# Altium PCB otis_v2.PcbDoc
Units mil, origin at the board's own origin, x right, y up, seen from the top; angles counter-clockwise.
Board outline 1718 x 899 mil, 2 copper layers (Top Layer, Bottom Layer); 13 components, 21 nets, 88 pads, 10 vias.
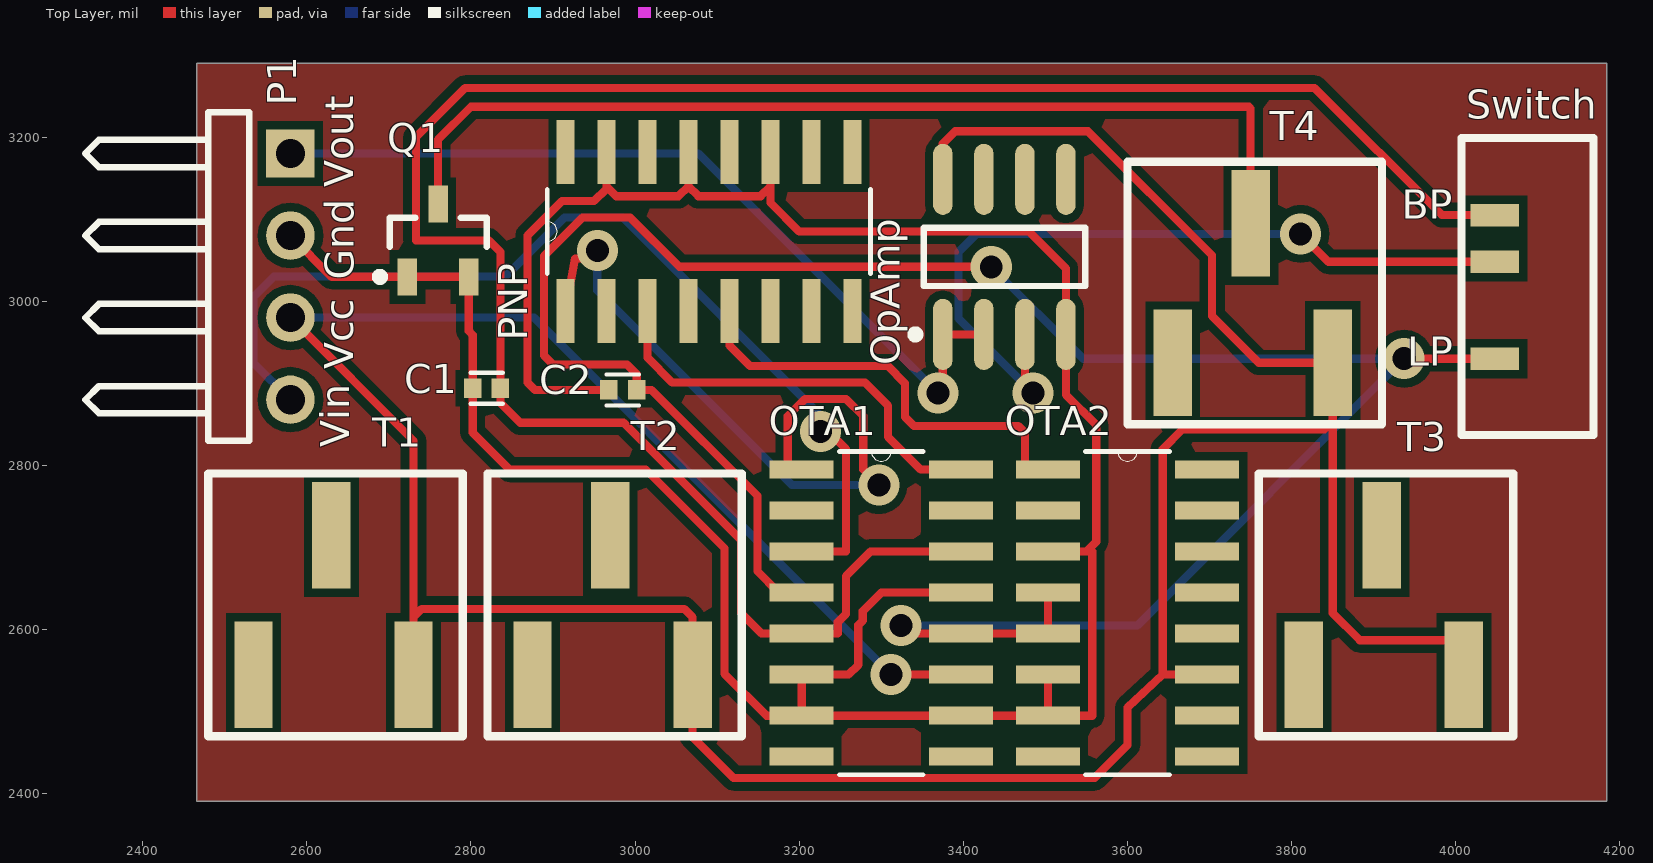
[diagram p0: Top Layer view]
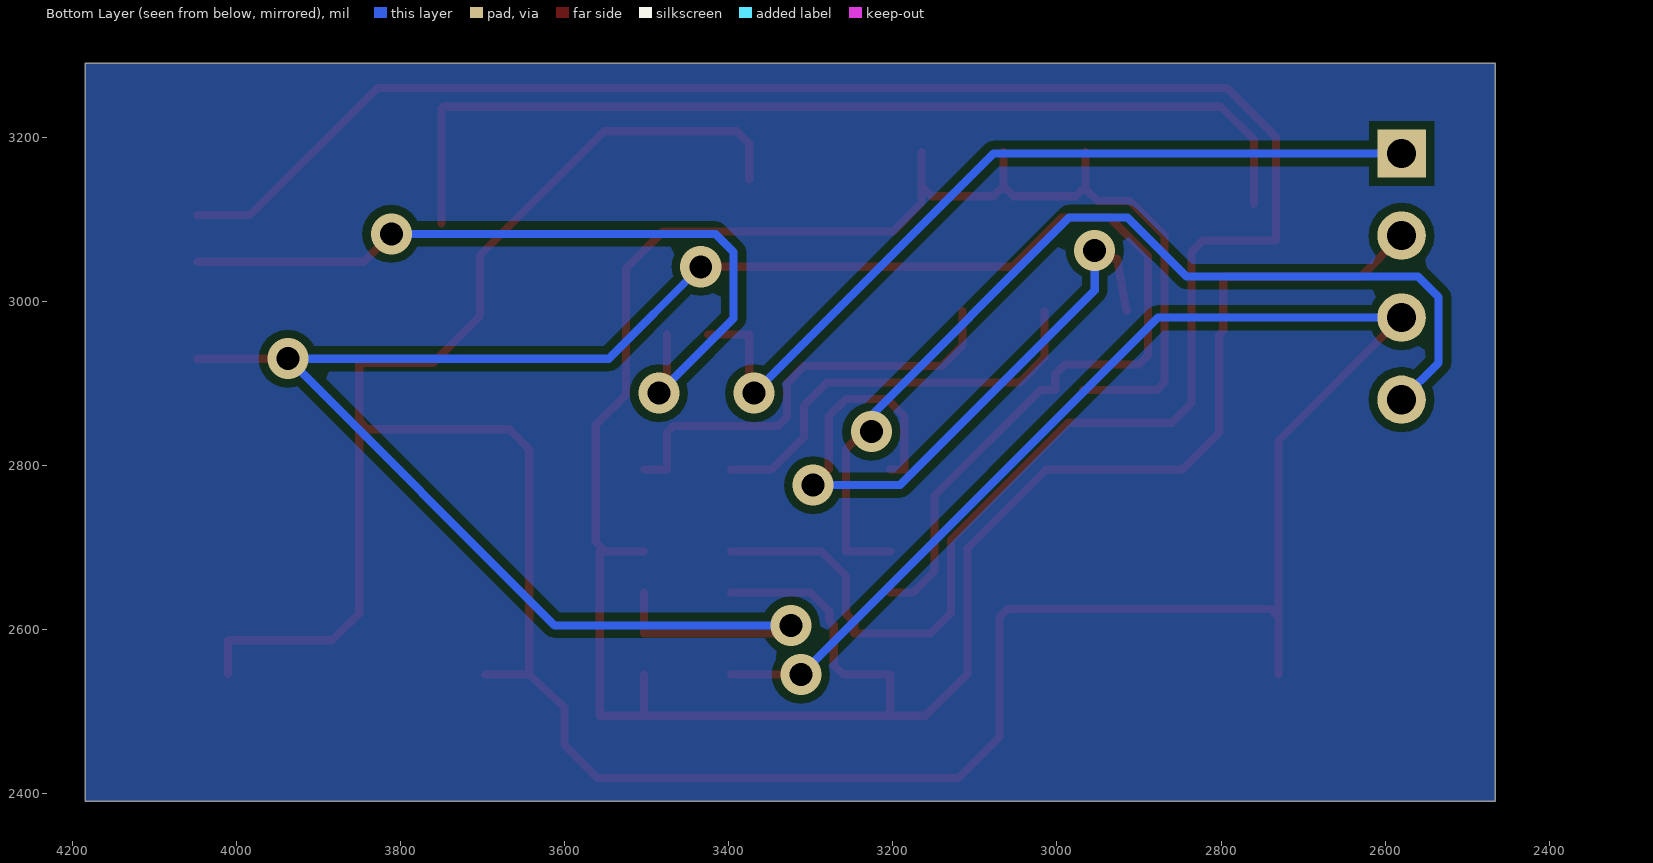
[diagram p1: Bottom Layer view, seen from below]

## Layer stack, top to bottom
Top Solder: solder mask 0.4, Solder Resist, Dk 3.5
Top Layer: signal copper 1.4
Dielectric1: dielectric 12.6, FR-4, Dk 4.8
Bottom Layer: signal copper 1.4
Bottom Solder: solder mask 0.4, Solder Resist, Dk 3.5

## Board outline
2490,3290 4184,3290 4184,2391 2466,2391 2466,3290

## Design rules (kind name [scope] priority, off if disabled: settings)
Clearance [All] p1: gap=10
FabricationTestPointUsage TestPointUsage [All] p1: valid=0 allowmultiple=FALSE
FabricationTestpoint Testpoint [All] p1: side=3 testpointundercomponent=TRUE minsize=40 maxsize=100 preferedsize=60 minholesize=0 maxholesize=40 preferedholesize=32 testpointgrid=1 allowsidetop=TRUE allowsidebottom=TRUE usegrid=TRUE gridtolerance=0.01
PolygonConnect [All] p1: connectstyle=Relief reliefconductorwidth=10 reliefentries=4 polygonreliefangle="90 Angle" airgapwidth=10
RoutingVias [All] p1: holewidth=28 width=50 viastyle="Through Hole" minholewidth=28 minwidth=50 maxholewidth=28 maxwidth=50
SolderMaskExpansion [All] p1: expansion=4
UnpouredPolygon [All] p1: allowunpoured=FALSE
Width [All] p1: maxlimit=15 minlimit=10 preferedwidth=10 minimp=50.000000 maximp=50.000000 favimp=50.000000
27 further rules are at their usual default settings.

## Components (designator, comment, footprint, x,y, rotation, side; value= is the part's Value field where it differs from the comment)
C1 "100pF" _C*CAPC1005X55N_CC0402C100K5GACAUTO_CPrimary_C 2819,2894 r0 top
C2 "100pF" _C*CAPC1005X55N_CC0402C100K5GACAUTO_CPrimary_C 2985,2892 r0 top
OpAmp "LF153D" SO8_N 3450,3054 r90 top (schematic designator U4)
OTA1 "" LM13700LM13700MLM13700LM13700MLM13700PrimaryLM13700 3300,2620 r0 top (schematic designator U1)
OTA2 "" LM13700LM13700MLM13700LM13700MLM13700PrimaryLM13700 3600,2620 r0 top (schematic designator U2)
P1 "Header 4H" HDR1X4H 2580,3180 r270 top
PNP "MMPQ3906" LM13700LM13700MLM13700LM13700MLM13700PrimaryLM13700 3090,3085 r90 top (schematic designator U3)
Q1 "PNP" SOT-23B_N 2760,3074 r90 top
Switch "" PCBComponent_1#1 14220,18260 r90 top (schematic designator S1)
T1 "" PCBComponent_1#2 17000,30620 r0 top
T2 "" PCBComponent_1#2 17340,30620 r0 top
T3 "" PCBComponent_1#2 18280,30620 r0 top
T4 "" PCBComponent_1#2 18120,31000 r0 top

## Footprints (in the part's own frame and the unit in brackets; to place one, negate y for a bottom-side part, rotate by r counter-clockwise, add the part's x,y. Pads: shape width x height; smd on the part's side, far side on the other; paste and mask are expansions set on the pad)
_C*CAPC1005X55N_CC0402C100K5GACAUTO_CPrimary_C [mm]
  rect 0.54x0.6 smd: 1(-0.43,0) 2(0.43,0)
  silkscreen extent -0.5,-0.48 0.5,0.48
HDR1X4H [mm] "Connector; Header; 4 Position; Right Angle"
  rect 1.5x1.5 hole 0.9: 1(0,0)
  round 1.5 hole 0.9: 2(2.54,0) 3(5.08,0) 4(7.62,0)
  silkscreen extent -1.27,-6.35 8.89,-1.27
LM13700LM13700MLM13700LM13700MLM13700PrimaryLM13700 [mil]
  rect 78x22 smd: 1(-97,175) 2(-97,125) 3(-97,75) 4(-97,25) 5(-97,-25) 6(-97,-75) 7(-97,-125) 8(-97,-175) 9(97,-175) 10(97,-125) 11(97,-75) 12(97,-25) 13(97,25) 14(97,75) 15(97,125) 16(97,175)
  silkscreen extent -51,-197 51,197
PCBComponent_1#1 [mm]
  rect 0.7x1.5 smd: 1(-389.382,258.381) 2(-386.385,258.381) 3(-384.937,258.381)
  round 0.9 on Top Solder: 8(-388.62,256.667) 9(-385.623,256.667)
  rect 1x0.8 on Top Paste: MP1(-390.728,257.581) MP2(-390.728,256.108) MP3(-383.515,257.581) MP4(-383.515,256.108)
  silkscreen extent -391.74,255.32 -382.55,259.41
PCBComponent_1#2 [mm]
  rect 1.19x3.3 smd: 1(-364.998,-708.787) 2(-367.411,-713.105) 3(-362.458,-713.105)
  silkscreen extent -368.81,-715.01 -360.93,-706.88
SO8_N [mm] "SOIC, 8-Leads, Body 4.9x3.9mm, Pitch 1.27mm, IPC Medium Density"
  oval 2.2x0.6 smd: 1(-2.4,1.905) 2(-2.4,0.635) 3(-2.4,-0.635) 4(-2.4,-1.905) 5(2.4,-1.905) 6(2.4,-0.635) 7(2.4,0.635) 8(2.4,1.905)
  silkscreen extent -2.52,-2.5 0.9,2.88, body extent -1.95,-2.45 1.95,2.45, height 1.75
SOT-23B_N [mm] "SOT23, 3-Leads, Body 2.9x1.3mm, Pitch 0.95mm, Lead Span 2.4mm, IPC Medium Density"
  rect 1.15x0.6 smd: 1(-1.125,0.95) 2(-1.125,-0.95) 3(1.125,0)
  silkscreen extent -1.25,-1.5 0.7,1.92, body extent -0.7,-1.5 0.7,1.5, height 1.14

## Part data
C1 C2: library part C0402C100K5GACAUTO, "CAPACITOR CERAMIC 10 PF 10% TOL 50V C0G 0402"
OpAmp: "Wide-Bandwidth Dual J-FET Operational Amplifier"
OTA1 OTA2 Switch T1 T2 T3 T4: library part Component_1
P1: "Header, 4-Pin, Right Angle"
PNP: library part LM13700M, "Dual Operational Transconductance Amplifier with Linearizing Diodes and Buffers 16-SOIC 0 to 70"
Q1: "PNP Bipolar Transistor"

## Via types
v1: diameter 50, hole 28, Top Layer to Bottom Layer, 10 vias

## Nets (pads, with @x,y where several pads share a name; then routed paths per layer and width w, separated by ;. In a path a pad name is that pad's centre, name@x,y a point inside that pad or via, vN(x,y) a via of type N, cw(c..) or ccw(c..) an arc to the next point about the centre after c; other vN are vias at no path point)
BP: C1.2 OTA1.5 OTA1.14 Switch.3 | length 2628.4
  Top Layer w10: OTA1.14 3287,2695 3257,2665 3257,2619 3247,2609 3247,2595 OTA1.5 3154,2595 3129,2620 3129,2709 2986,2852 2860,2852 2835.93,2876.07 C1.2 2835.93,3060 2821.93,3074 2733,3074 2733,3200 2793,3260 3828,3260 3983,3105 Switch.3
GND: C1.1 C2.1 OpAmp.4 OTA1.6 OTA1.7 OTA1.10 OTA1.13 OTA2.3 OTA2.6 OTA2.7 P1.2 PNP.11 PNP.13 PNP.15 Q1.1 Q1.2 | length 3570.6
  Top Layer w10: P1.2 2630.29,3029.71 Q1.1 Q1.2 2797.4,2963.67 2802.07,2959 C1.1 2802.07,2840 2847.07,2795 3013,2795 3109,2699 3109,2546 3160,2495 OTA1.7 ; PNP.15 2965,3140 ; C2.1 2878,2892 2869,2901 2869,3080 2911,3122 2950,3122 2965,3137 2965,3140 ; PNP.13 3065,3140 ; PNP.11 3165,3140 ; OTA1.13 3300,2645 3277.47,2622.47 3277.47,2610.94 3272,2605.47 3272,2557 3260,2545 OTA1.6 OTA1.7 ; OTA2.6 OTA2.7 ; OTA2.3 3550,2695 ; 2965,3140 2977,3128 3053,3128 3065,3140 ; 3065,3140 3077,3128 3153,3128 3165,3140 ; 3165,3140 3165,3120 3200,3085 3480,3085 3525,3040 OpAmp.4 3525,2886 3562,2849 3562,2707 3550,2695 ; OTA1.7 OTA1.10 OTA2.7 ; OTA2.7 3557,2495 3557,2695 3550,2695
LP: C2.2 OTA1.4 OTA1.12 OTA2.4 OTA2.5 Switch.1 | length 2849.8
  Top Layer w10: OTA1.4 3175,2645 3149,2671 3149,2763 3020,2892 C2.2 3001.93,2911.07 2990,2923 2900,2923 2889,2934 2889,3055.08 2935.92,3102 2994,3102 3054,3042 v1(3434,3042) ; v1(3324,2605) 3334,2595 OTA1.12 OTA2.5 OTA2.4 ; v1(3937,2930) Switch.1
  Bottom Layer w10: v1(3324,2605) 3612,2605 v1(3937,2930) 3546,2930 v1(3434,3042)
NetOpAmp_1: OpAmp.1 OpAmp.2 P1.1 | length 1033.9
  Top Layer w10: v1(3369,2888) 3375,2894 OpAmp.1 OpAmp.2
  Bottom Layer w10: P1.1 3077,3180 v1(3369,2888)
NetOpAmp_3: OpAmp.3 Switch.2 | length 962
  Top Layer w10: OpAmp.3 3475,2898 v1(3485,2888) ; v1(3811,3082) 3845,3048 Switch.2
  Bottom Layer w10: v1(3485,2888) 3394,2979 3394,3060 3416,3082 v1(3811,3082)
NetOTA1: 
NetOTA1_1: OTA1.1 PNP.1 | length 875.6
  Top Layer w10: PNP.1 2927,3052 2954,3052 v1(2954,3062) ; OTA1.1 3186,2795 3186,2860 3207,2881 3257,2881 3278,2860 3278,2795 v1(3297,2776)
  Bottom Layer w10: v1(2954,3062) 2954,3013 3191,2776 v1(3297,2776)
NetOTA1_16: OTA1.16 PNP.3 | length 517.5
  Top Layer w10: PNP.3 3015,2931.2 3045.2,2901 3280,2901 3308.25,2872.75 3308.25,2834.75 3348,2795 OTA1.16
NetOTA2: 
NetOTA2_1: OTA2.1 PNP.5 | length 542.9
  Top Layer w10: PNP.5 3115,2946 3140,2921 3308,2921 3329,2900 3329,2859 3340,2848 3467,2848 3475,2840 3475,2795 OTA2.1
NetOTA3: 
NetPNP_12: PNP.12
NetPNP_14: PNP.14
NetPNP_16: PNP.16
NetQ1_1: 
NetQ1_3: Q1.3 T4.1 | length 1226.1
  Top Layer w10: Q1.3 2760,3197 2800,3237 3748,3237 3750,3235 T4.1
NetQ2_3: T1.1
NetQ3_3: T2.1
NetQ4_3: T3.1
VCC: OpAmp.8 OTA1.11 OTA2.11 P1.3 T1.3 T2.3 T3.3 T4.3 | length 4416.2
  Top Layer w10: P1.3 2730,2830 2730,2615 ; T1.3 2730,2615 ; v1(3312,2545) OTA1.11 ; OpAmp.8 3375,3192 3390,3207 3552,3207 3703,3056 3703,2982 3760,2925 T4.3 3850,2854 ; OTA2.11 3643,2545 ; T3.3 4010,2587 3883,2587 3850,2620 3850,2854 ; 2730,2615 2740,2625 3060,2625 3070,2615 T2.3 3070,2469 3120,2419 3560,2419 3600,2459 3600,2505 3643,2545 ; 3643,2545 3643,2820 3667,2844 3840,2844 3850,2854
  Bottom Layer w10: P1.3 2877,2980 v1(3312,2545)
VIN: OTA1.3 P1.4 | length 1213.3
  Top Layer w10: OTA1.3 3257,2695 3257,2820 3236,2841 v1(3226,2841)
  Bottom Layer w10: P1.4 2535,2925 2535,3005 2560,3030 2841.92,3030 2913.92,3102 2985,3102 3226,2861 v1(3226,2841)
pads on no net: OpAmp.5 OpAmp.6 OpAmp.7 OTA1.2 OTA1.8 OTA1.9 OTA1.15 OTA2.2 OTA2.8 OTA2.9 OTA2.10 OTA2.12 OTA2.13 OTA2.14 OTA2.15 OTA2.16 PNP.2 PNP.4 PNP.6 PNP.7 PNP.8 PNP.9 PNP.10 Switch.8 Switch.9 Switch.MP1 Switch.MP2 Switch.MP3 Switch.MP4 T1.2 T2.2 T3.2 T4.2

## Polygon pours and split planes (outlines as drawn)
no net on Top Layer "gnd" (solid, pour order 1000): 2466,3290 4184,3290 4184,2391 2466,2391
no net on Bottom Layer "gnd" (solid, pour order 1001): 2466,3290 4184,3290 4184,2391 2466,2391

## Silkscreen, mask and mechanical layers (free items; w line width, h text height)
Top Overlay:
  text "Vout" at 2668,3139 h60 r90
  text "BP" at 3934,3089 h60
  text "Gnd" at 2669,3026 h60 r90
  text "Vcc" at 2668,2917 h60 r90
  text "LP" at 3941,2910 h60
  text "Vin" at 2663,2822 h60 r90